# EAGLE board main05 (EAGLE 7.4.0)
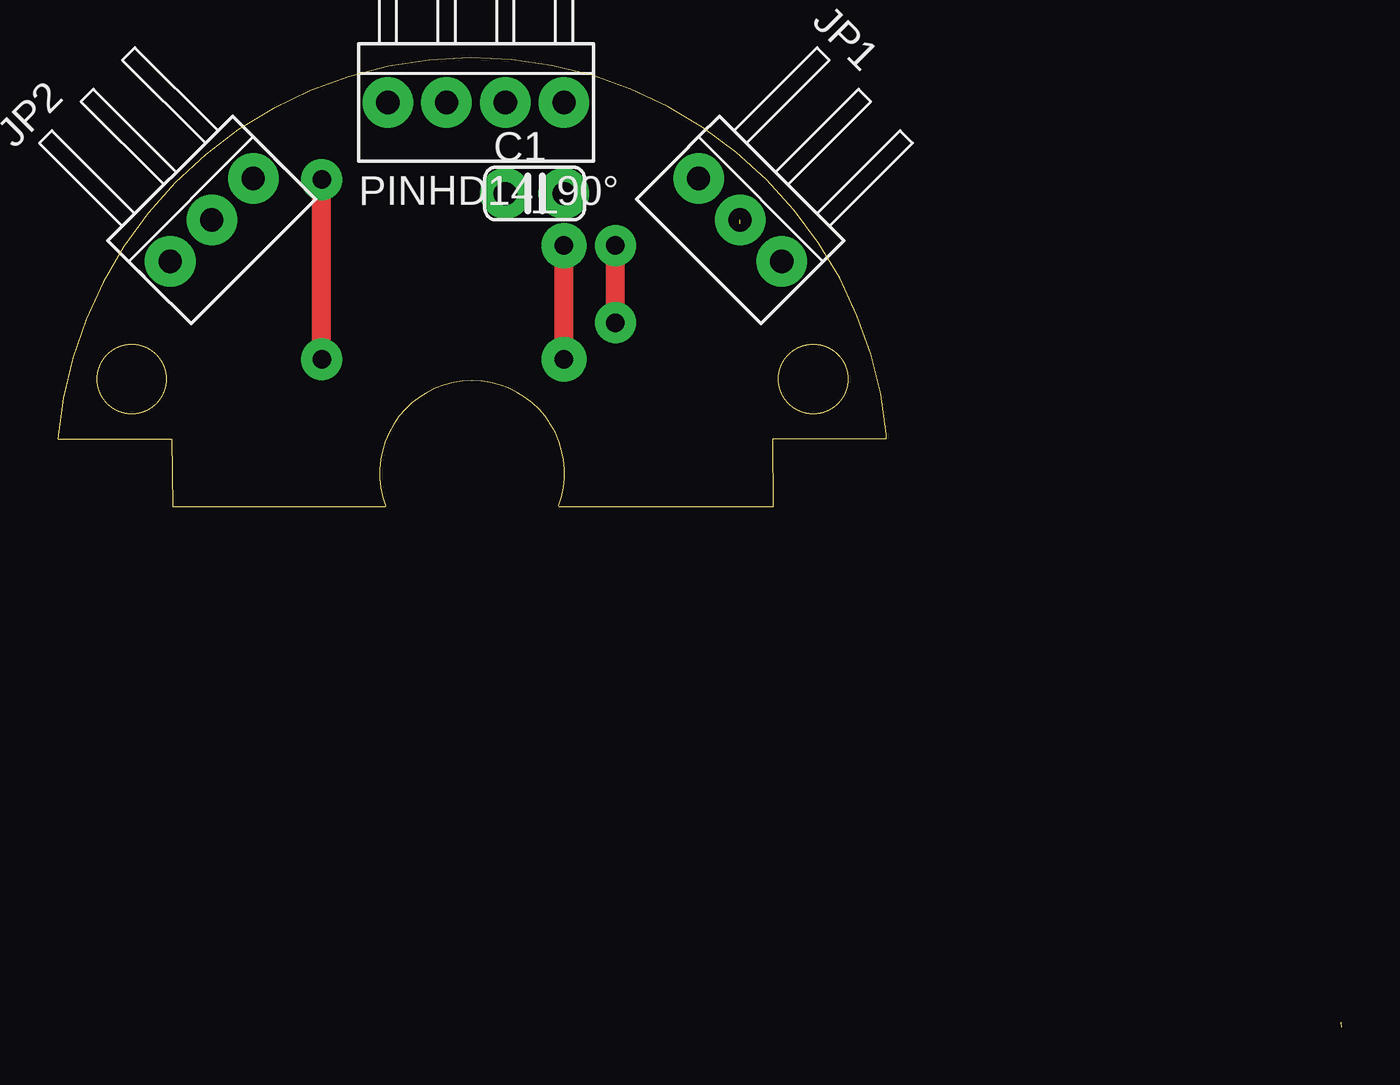
[diagram p0: board, top side]
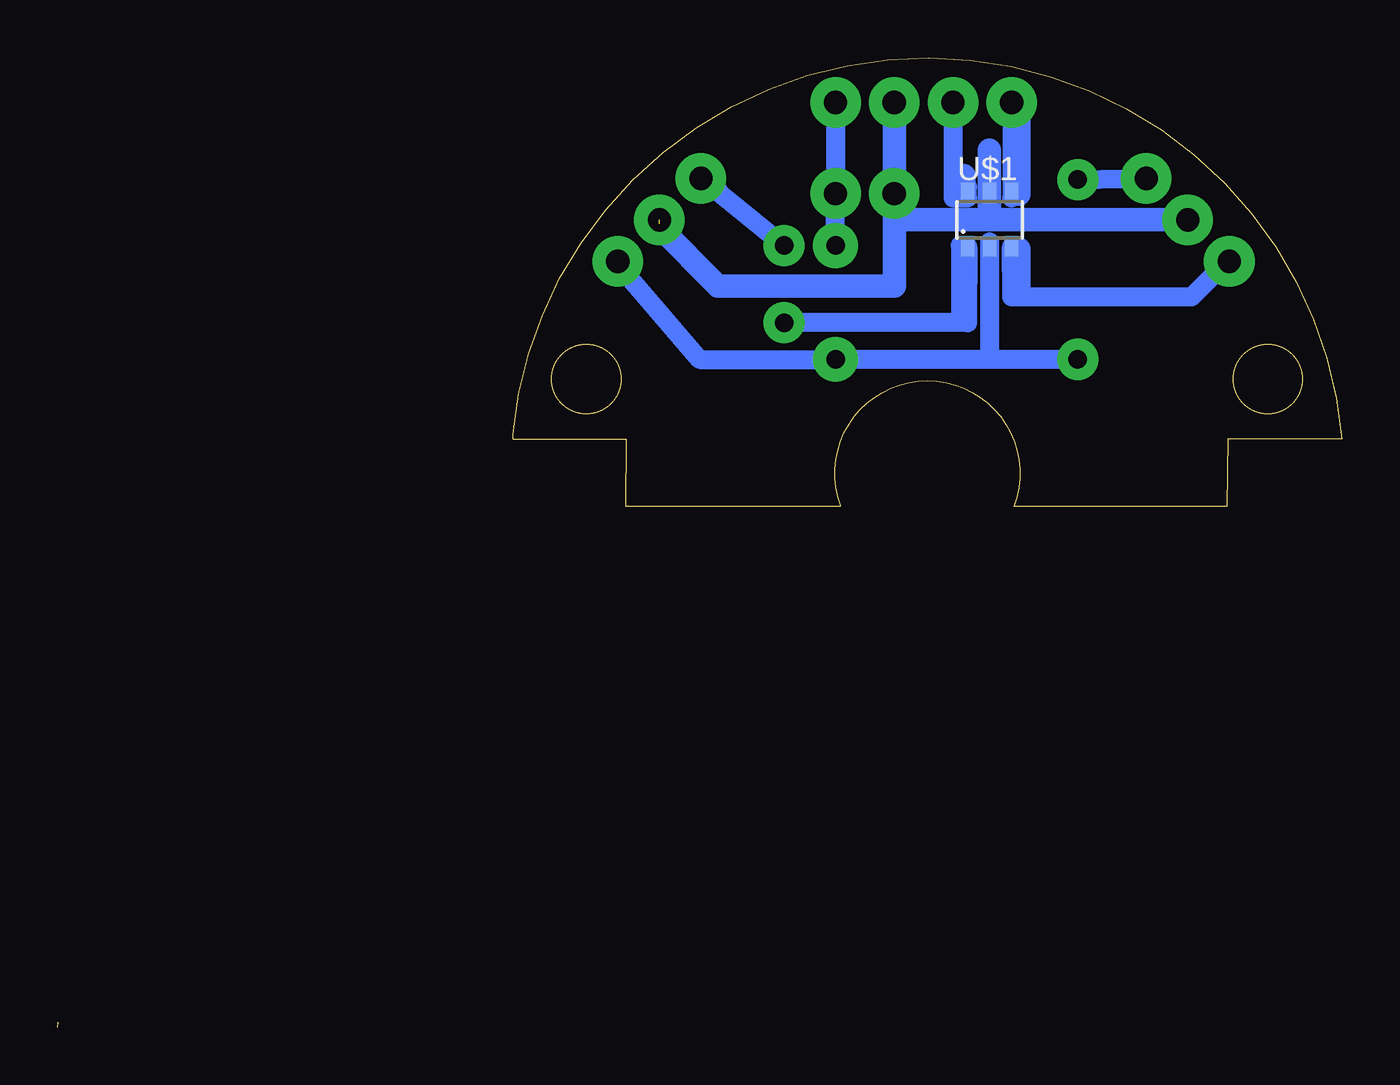
[diagram p1: board, bottom side, seen from below]

Size 55.54 x 41.94 mm. Coordinates in mm from the lower left corner, seen from the top.
Outline: 21.67,22.55 arc221 14.18,22.55
Outline: 55.54,0 55.51,0.2
Outline: 14.19,22.53 4.97,22.53 4.92,25.45 0.02,25.45
Outline: 21.68,22.53 30.95,22.53 30.93,25.45 35.86,25.45 35.86,25.63 arc170 0,25.45
Outline: circle at 32.68,28.04 radius 1.5
Outline: circle at 3.19,28.04 radius 1.5
Copper layers (1*16): Top 0.035mm / dielectric 1.5mm / Bottom 0.035mm
Design rules "default": minimum track width 10mil, minimum drill 24mil, track to track 8mil, track to pad 8mil, pad to pad 8mil, via to via 8mil, smd to smd 8mil, copper to edge 40mil, drill to drill 8mil, minimum pad ring 10mil, minimum via ring 8mil, stop-mask expansion 4mil, vias tented up to drill 0mil, thermal gap 10mil

## Footprints (pad centres in the part's own frame; a part is rotated, then mirrored left to right if it is on the bottom)
MLCC_25 = drill 1 pad 2.184: 1 -1.27,0; 2 1.27,0
1*3_90 = drill 1 pad 2.184: 1 -2.54,0; 2 0,0; 3 2.54,0
74LVC2G17 = smd 0.6 x 0.9: 1 -0.95,-1.15; 2 0,-1.15; 3 0.95,-1.15; 4 0.95,1.15; 5 0,1.15; 6 -0.95,1.15
1*4_90 = drill 1 pad 2.184: 1 -3.81,0; 2 -1.27,0; 3 1.27,0; 4 3.81,0

## Placement (x,y rotation side)
C1  [MLCC_25]  20.63,36.07 0 top
JP1  [1*3_90]  29.52,34.92 315 top
JP2  [1*3_90]  6.66,34.92 45 top
U$1  74LVC2G17  [74LVC2G17]  15.23,34.92 0 bottom
U$2  PINHD14_90°  [1*4_90]  18.09,40.01 0 top

## Library data of the parts
C1 = rcl__s
JP1 JP2 U$2 = pinhead_s
U$1 = 74LVC2G17

## Nets
+5V: C1.1 JP1.2 JP2.2 U$1.5 U$2.3
GND: C1.2 JP1.3 JP2.3 U$1.2 U$2.4
N$1: U$1.6 U$2.2
N$2: U$1.4 U$2.1
N$3: JP1.1 U$1.1
N$4: JP2.1 U$1.3

## Tracks (layer width: path | path; a pad name or v marks a point on that pad's centre or on a via)
+5V  (1 unrouted)
  Bottom 0.61: JP2.2 15.23,34.92 | U$1.5 15.23,35.56 15.23,35.24 15.23,34.92 | 15.23,34.92 19.36,34.92 C1.1 19.36,36.2
  Bottom 0.813: U$2.3 19.36,36.2 19.36,34.92 19.36,32.07 | 26.98,32.07 29.52,34.77 | 15.23,35.56 15.23,37.78
  Bottom 1.016: 15.23,35.24 15.23,37.94 | JP2.2 19.36,34.92 U$2.3 19.36,32.07 26.98,32.07 29.52,34.61 29.52,34.77
GND  (via drill 0.8 pad 1.78, 0.8 pad 1.93)
  Top 0.813: v21.9,28.89 v21.9,33.81 | v11.42,28.89 v11.42,36.67
  Bottom 0.61: 15.23,29.21 U$1.2 15.23,33.97
  Bottom 0.813: v21.9,33.81 C1.2 U$2.4 | v11.42,28.89 15.23,28.89 | 15.23,28.89 v21.9,28.89 27.77,28.89 31.42,33.13 JP1.3 | 15.23,33.97 15.23,29.21 15.23,28.89 | v11.42,36.67 JP2.3
N$1
  Bottom 0.61: U$1.6 16.82,36.04 16.82,36.35
  Bottom 0.813: U$2.2 16.82,36.35 | 16.82,36.35 16.82,35.88 16.18,35.88 16.18,36.35 16.82,36.35
N$2
  Bottom 0.61: U$1.4 U$2.1
  Bottom 0.813: U$2.1 14.28,35.88
N$3  (via drill 0.8 pad 1.78)
  Top 0.813: v24.12,30.48 v24.12,33.81
  Bottom 0.813: U$1.1 16.18,30.48 v24.12,30.48 | v24.12,33.81 JP1.1
N$4
  Bottom 0.813: JP2.1 4.96,33.13 6.5,31.59 14.28,31.59 U$1.3
N$5
  Bottom 0.61: 15.23,36.2 15.23,37.31
N$6
  Bottom 0.813: 26.98,36.2 27.61,36.67
N$10
  Bottom 0.813: 16.5,33.81 16.5,30.8
N$11
  Bottom 1.016: 13.96,33.66 13.96,31.75
N$12
  Bottom 1.016: 14.12,36.04 13.96,36.04 13.96,39.85
N$13
  Bottom 1.016: 16.34,36.04 16.34,36.83